# Altium PCB PCB1.PcbDoc
Units mm, origin at the board's own origin, x right, y up, seen from the top; angles counter-clockwise.
Board outline 152.4 x 101.6 mm, 2 copper layers (Top Layer, Bottom Layer); 35 components, 0 nets, 448 pads, 6 vias.
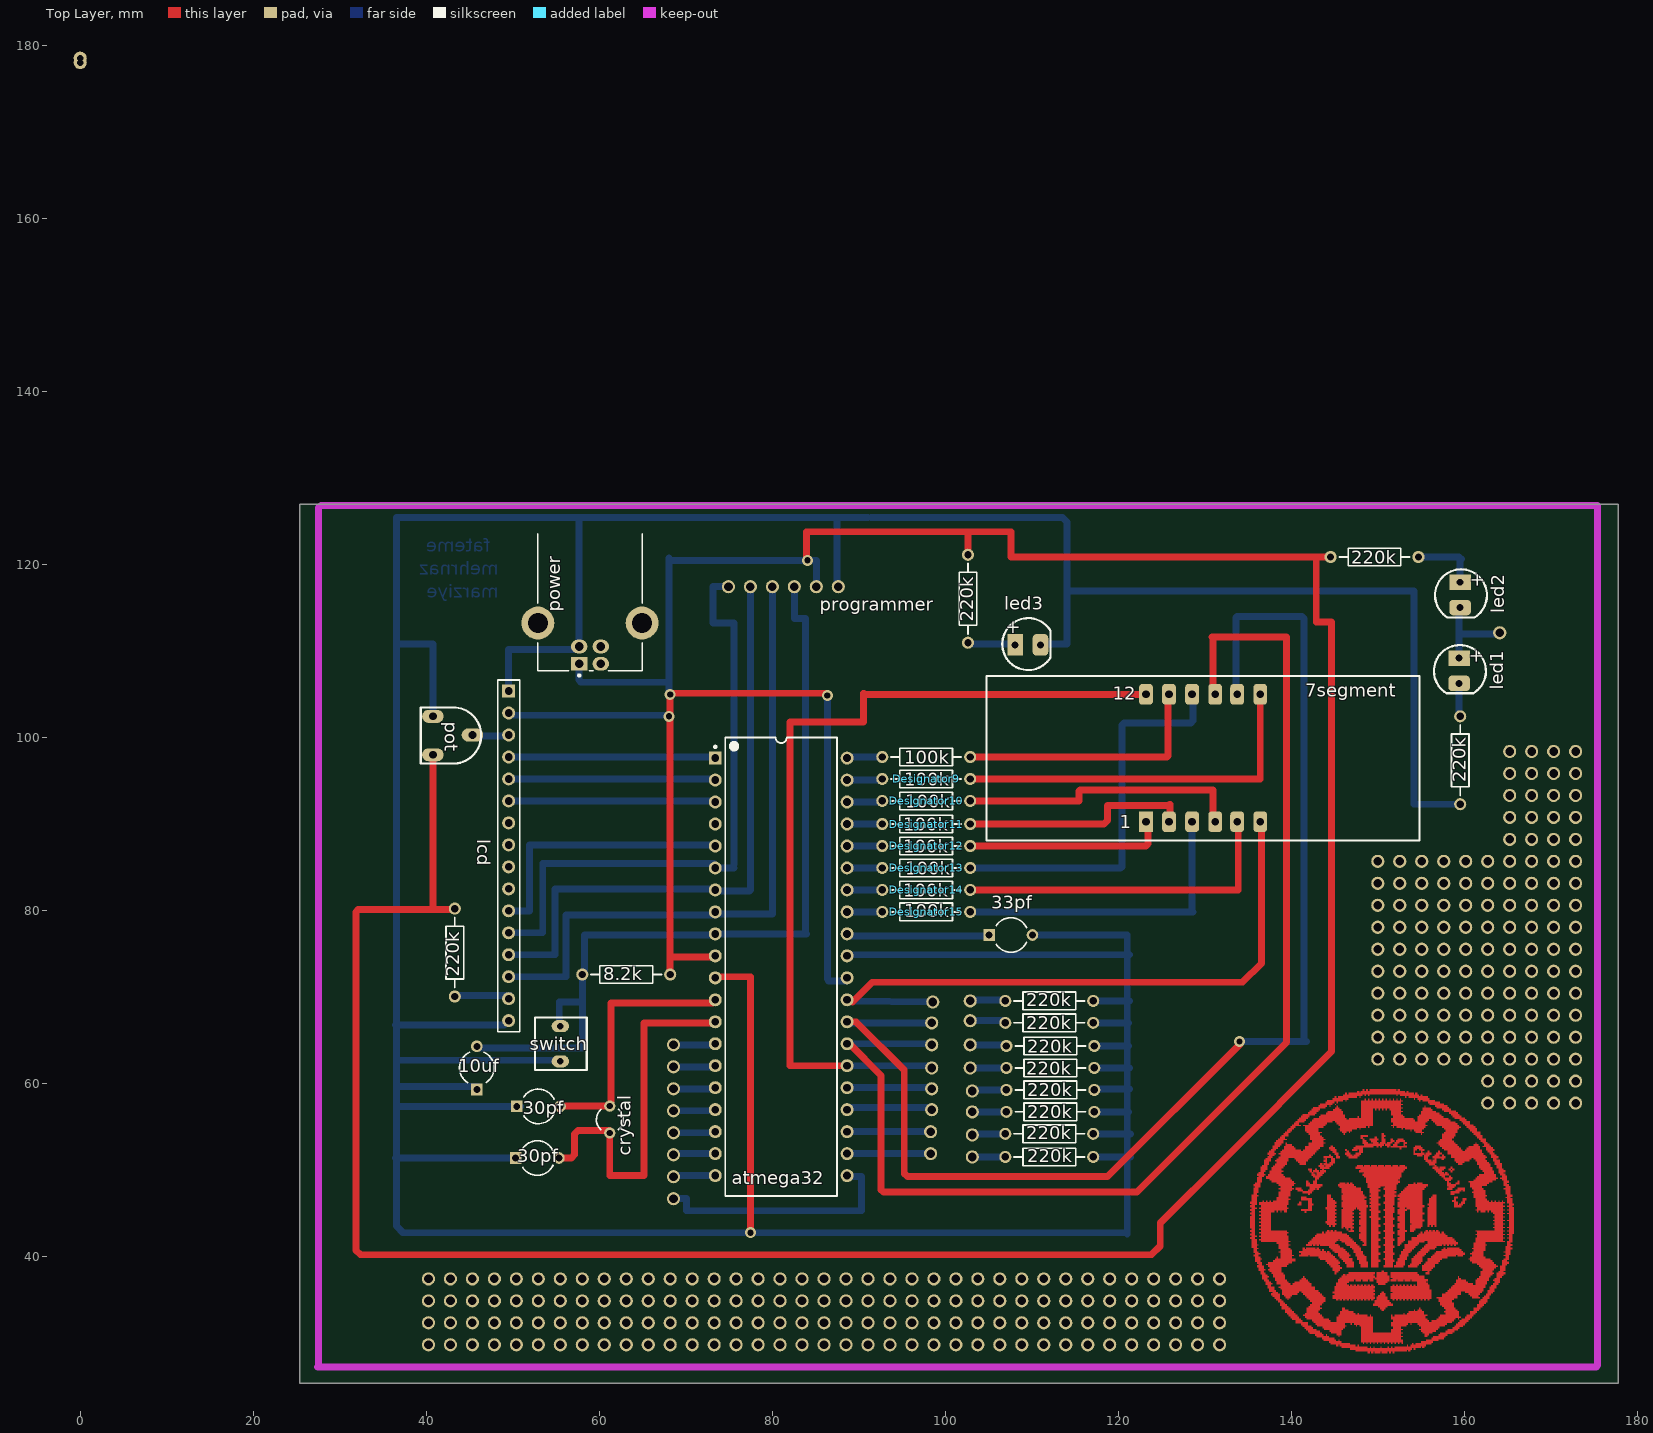
[diagram p0: Top Layer view]
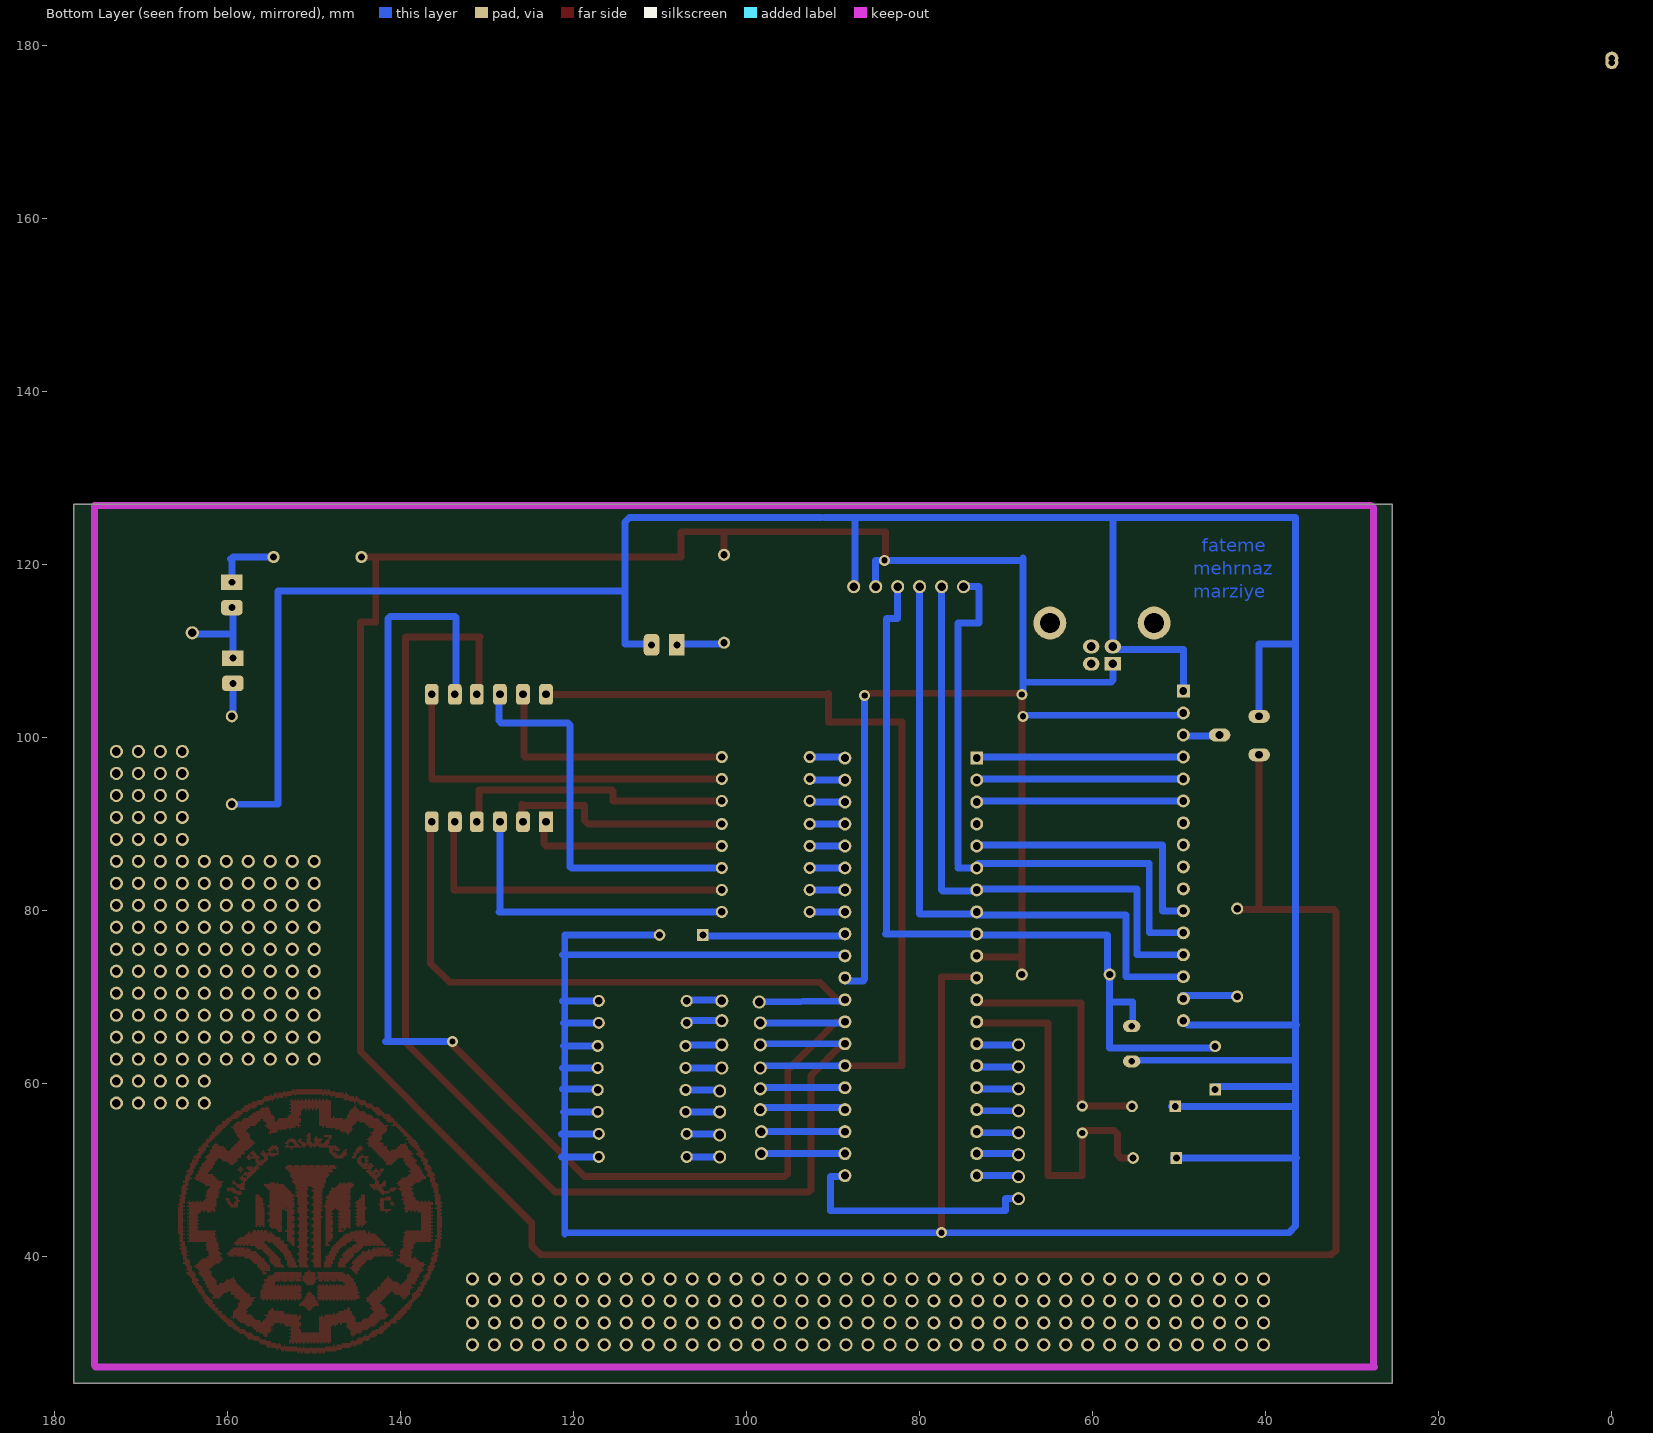
[diagram p1: Bottom Layer view, seen from below]

## Layer stack, top to bottom
Top Solder: solder mask 0.0102, Solder Resist, Dk 3.5
Top Layer: signal copper 0.0356
Dielectric 1: dielectric 0.32, FR-4, Dk 4.8
Bottom Layer: signal copper 0.0356
Bottom Solder: solder mask 0.0102, Solder Resist, Dk 3.5

## Board outline
25.4,25.4 177.8,25.4 177.8,127 25.4,127

## Design rules (kind name [scope] priority, off if disabled: settings)
Clearance [All] p1: gap=0.254
PolygonConnect [All] p1: connectstyle=Relief reliefconductorwidth=0.254 reliefentries=4 polygonreliefangle="90 Angle" airgapwidth=0.254
RoutingVias [All] p1: holewidth=0.711 width=1.27 viastyle="Through Hole" minholewidth=0.711 minwidth=1.27 maxholewidth=0.711 maxwidth=1.27
SolderMaskExpansion [All] p1: expansion=0.102
Width [All] p1: maxlimit=0.254 minlimit=0.254 preferedwidth=0.254
30 further rules are at their usual default settings.

## Components (designator, comment, footprint, x,y, rotation, side; value= is the part's Value field where it differs from the comment)
7segment "Comment" 7segCA 104.775,88.138 r0 top
8.2k "Comment" AXIAL-0.4 63.119,72.644 r0 top
10uf "Comment" CAPR5-4X5 45.847,61.849 r90 top
30pf "Comment" CAPR5-4X5 52.959,57.404 r0 top
30pf "Comment" CAPR5-4X5 52.832,51.435 r0 top
33pf "Comment" CAPR5-4X5 107.569,77.216 r0 top
100k "Comment" AXIAL-0.4 97.79,97.79 r0 top
220k "Comment" AXIAL-0.4 112.141,61.849 r0 top
220k "Comment" AXIAL-0.4 112.014,51.562 r0 top
220k "Comment" AXIAL-0.4 112.014,54.229 r0 top
220k "Comment" AXIAL-0.4 112.141,59.309 r0 top
220k "Comment" AXIAL-0.4 112.141,56.769 r0 top
220k "Comment" AXIAL-0.4 112.141,64.389 r0 top
220k "Comment" AXIAL-0.4 112.014,67.056 r0 top
220k "Comment" AXIAL-0.4 112.014,69.596 r0 top
220k "Comment" AXIAL-0.4 43.307,75.184 r90 top
220k "Comment" AXIAL-0.4 149.606,120.904 r0 top
220k "Comment" AXIAL-0.4 159.512,97.409 r90 top
220k "Comment" AXIAL-0.4 102.616,116.078 r90 top
atmega32 "Comment" 40P6 81.026,73.533 r0 top
crystal "Comment" R38 61.214,55.88 r180 top
Designator9 "100k" AXIAL-0.4 97.79,95.25 r0 top
Designator10 "100k" AXIAL-0.4 97.79,92.71 r0 top
Designator11 "100k" AXIAL-0.4 97.79,90.043 r0 top
Designator12 "100k" AXIAL-0.4 97.79,87.503 r0 top
Designator13 "100k" AXIAL-0.4 97.79,84.963 r0 top
Designator14 "100k" AXIAL-0.4 97.79,82.423 r0 top
Designator15 "100k" AXIAL-0.4 97.79,79.883 r0 top
lcd "Comment" HDR1X16 49.53,105.41 r270 top
led1 "Comment" LED-1 159.385,107.823 r0 top
led2 "Comment" LED-1 159.512,116.586 r0 top
led3 "Comment" LED-1 109.474,110.744 r90 top
pot "Comment" POT3 39.37,103.505 r270 top
power "Comment" USB2.5-2H4F 58.928,123.571 r90 top
switch "Comment" PB-2pin 58.547,61.595 r90 top

## Footprints (in the part's own frame and the unit in brackets; to place one, negate y for a bottom-side part, rotate by r counter-clockwise, add the part's x,y. Pads: shape width x height; smd on the part's side, far side on the other; paste and mask are expansions set on the pad)
7segCA [mm] "7seg-CA; 12 Leads"
  rect 1.6x2.4 hole 0.9: 1(18.415,2.159)
  rrect50% 1.6x2.4 hole 0.9: 2(21.082,2.159) 3(23.749,2.159) 4(26.416,2.159) 5(28.956,2.159) 6(31.623,2.159) 7(31.623,16.891) 8(28.956,16.891) 9(26.416,16.891) 10(23.749,16.891) 11(21.082,16.891) 12(18.415,16.891)
  silkscreen extent 0,0 50.04,19
40P6 [mm] "40-Pin Ceramic Dual In-Line Package (CerDIP)"
  rect 1.5x1.5 hole 0.9: 1(-7.62,24.13)
  round 1.5 hole 0.9: 2(-7.62,21.59) 3(-7.62,19.05) 4(-7.62,16.51) 5(-7.62,13.97) 6(-7.62,11.43) 7(-7.62,8.89) 8(-7.62,6.35) 9(-7.62,3.81) 10(-7.62,1.27) 11(-7.62,-1.27) 12(-7.62,-3.81) 13(-7.62,-6.35) 14(-7.62,-8.89) 15(-7.62,-11.43) 16(-7.62,-13.97) 17(-7.62,-16.51) 18(-7.62,-19.05) 19(-7.62,-21.59) 20(-7.62,-24.13) 21(7.62,-24.13) 22(7.62,-21.59) 23(7.62,-19.05) 24(7.62,-16.51) 25(7.62,-13.97) 26(7.62,-11.43) 27(7.62,-8.89) 28(7.62,-6.35) 29(7.62,-3.81) 30(7.62,-1.27) 31(7.62,1.27) 32(7.62,3.81) 33(7.62,6.35) 34(7.62,8.89) 35(7.62,11.43) 36(7.62,13.97) 37(7.62,16.51) 38(7.62,19.05) 39(7.62,21.59) 40(7.62,24.13)
  silkscreen extent -7.74,-26.5 6.45,26.5, body extent -7.05,-26.47 7.05,26.47, height 4.83
AXIAL-0.4 [mm] "Axial Device, Thru-Hole; 2 Leads; 0.4 in Pin Spacing"
  round 1.4 hole 0.85: 1(-5.08,0) 2(5.08,0)
  silkscreen extent -4.06,-1.02 4.06,1.02
CAPR5-4X5 [mm] "Capacitor; 2 Leads"
  rect 1.35x1.35 hole 0.8: 1(-2.5,0)
  round 1.35 hole 0.8: 2(2.5,0)
  silkscreen extent -1.69,-2 1.82,2
HDR1X16 [mm] "Connector; Header; 16 Position"
  rect 1.5x1.5 hole 0.9: 1(0,0)
  round 1.5 hole 0.9: 2(2.54,0) 3(5.08,0) 4(7.62,0) 5(10.16,0) 6(12.7,0) 7(15.24,0) 8(17.78,0) 9(20.32,0) 10(22.86,0) 11(25.4,0) 12(27.94,0) 13(30.48,0) 14(33.02,0) 15(35.56,0) 16(38.1,0)
  silkscreen extent -1.27,-1.27 39.37,1.27
LED-1 [mm] "LED; 2 Leads"
  rect 2.5x1.8 hole 0.8: 1(0,1.397)
  rrect50% 2.5x1.8 hole 0.8: 2(0,-1.524)
  silkscreen extent -2.91,-2.67 3.09,2.9
PB-2pin [mil] "Switch"
  oval 55.12x78.74 hole 30: 1(40,120) 2(200,120)
  silkscreen extent 0,0 240,235
POT3 [mm]
  oval 1.5x2.5 hole 0.9: 1(1.016,1.397) 2(5.461,1.397) 3(3.175,5.969)
  silkscreen extent 0,0 6.48,6.98
R38 [mm] "Crystal, Thru-Hole; 2 Leads; Body 3.1 x 8.2 mm (Dia.xH)"
  round 1.3 hole 0.7: 1(0,1.55) 2(0,-1.55)
  silkscreen extent -1.55,-1.19 1.55,1.17
USB2.5-2H4F [mm] "Connector; USB1.1, Type B, Thru-Hole; 4 Position; Right Angle"
  rect 1.6x1.9 hole 1: 1(-15.01,1.25)
  oval 1.6x1.9 hole 1: 2(-15.01,-1.25) 3(-13.01,-1.25) 4(-13.01,1.25)
  round 3.8 hole 2.3: 5(-10.3,6.02) 6(-10.3,-6.02)
  silkscreen extent -16.48,-6.05 -0.02,6.05, body extent -16.51,-7.45 -0.01,7.45, height 10.95

## Free pads (board coordinates)
  round 1.524 hole 0.762: 1(0,178.054) 2(0,178.562)
  round 1.524 hole 1: 13(98.552,69.469) 14(98.425,67.056) 15(98.425,64.516) 16(98.425,61.849) 17(98.425,59.436) 18(98.425,57.023) 19(98.298,54.483) 20(98.298,51.943) 21(102.87,69.596) 22(102.87,67.31) 23(102.87,64.516) 24(102.87,61.849) 25(103.124,59.182) 26(103.124,56.769) 27(103.124,54.102) 28(103.124,51.562) 32(68.58,64.516) 33(68.58,61.976) 34(68.58,59.436) 35(68.58,56.896) 36(68.58,54.356) 37(68.58,51.816) 38(68.58,49.276) 39(68.58,46.736) 49(77.47,117.475) 50(80.01,117.475) 52(85.09,117.475) 53(87.63,117.475) 76(164.084,112.141) 77(172.847,98.425) 78(172.847,95.885) 79(172.847,93.345) 80(172.847,90.805) 82(172.847,88.265) 83(172.847,85.725) 84(172.847,83.185) 85(172.847,80.645) 86(172.847,78.105) 87(172.847,75.565) 88(172.847,73.025) 89(172.847,70.485) 90(172.847,67.945) 91(172.847,65.405) 92(172.847,62.865) 93(172.847,60.325) 94(172.847,57.785) 96(170.307,98.425) 97(170.307,95.885) 98(170.307,93.345) 99(170.307,90.805) 100(170.307,88.265) 101(170.307,85.725) 102(170.307,83.185) 105(170.307,80.645) 106(170.307,78.105) 107(170.307,75.565) 108(170.307,73.025) 109(170.307,70.485) 110(170.307,67.945) 111(170.307,65.405) 112(170.307,62.865) 113(170.307,60.325) 114(170.307,57.785) 115(167.767,57.785) 116(167.767,60.325) 117(167.767,62.865) 118(167.767,65.405) 119(167.767,67.945) 120(167.767,70.485) 121(167.767,73.025) 122(167.767,75.565) 123(167.767,78.105) 124(167.767,80.645) 125(167.767,83.185) 126(167.767,85.725) 127(167.767,88.265) 128(167.767,90.805) 129(167.767,93.345) 130(167.767,95.885) 131(167.767,98.425) 132(165.227,98.425) 133(165.227,95.885) 134(165.227,93.345) 135(165.227,90.805) 136(165.227,88.265) 137(165.227,85.725) 138(165.227,83.185) 139(165.227,80.645) 140(165.227,78.105) 141(165.227,75.565) 142(165.227,73.025) 143(165.227,70.485) 144(165.227,67.945) 145(165.227,65.405) 146(165.227,62.865) 147(165.227,60.325) 148(165.227,57.785) 149(162.687,57.785) 150(162.687,60.325) 151(162.687,62.865) 152(162.687,65.405) 153(162.687,67.945) 154(162.687,70.485) 155(162.687,73.025) 156(162.687,75.565) 157(162.687,78.105) 158(162.687,80.645) 159(162.687,83.185) 160(162.687,85.725) 163(160.147,62.865) 164(160.147,65.405) 165(160.147,67.945) 166(160.147,70.485) 167(160.147,73.025) 168(160.147,75.565) 169(160.147,78.105) 170(160.147,80.645) 171(160.147,83.185) 172(160.147,85.725) 174(157.607,85.725) 175(157.607,83.185) 176(157.607,80.645) 177(157.607,78.105) 178(157.607,75.565) 179(157.607,73.025) 180(157.607,70.485) 181(157.607,67.945) 182(157.607,65.405) 183(157.607,62.865) 185(155.067,85.725) 186(155.067,83.185) 187(155.067,80.645) 188(155.067,78.105) 189(155.067,75.565) 190(155.067,73.025) 191(155.067,70.485) 192(155.067,67.945) 193(155.067,65.405) 194(155.067,62.865) 195(152.527,62.865) 196(152.527,65.405) 197(152.527,67.945) 198(152.527,70.485) 199(152.527,73.025) 200(152.527,75.565) 201(152.527,78.105) 202(152.527,80.645) 203(152.527,83.185) 204(152.527,85.725) 205(149.987,85.725) 206(149.987,83.185) 207(149.987,80.645) 208(149.987,78.105) 209(149.987,75.565) 210(149.987,73.025) 211(149.987,70.485) 212(149.987,67.945) 213(149.987,65.405) 214(149.987,62.865) 221(82.55,117.475) 229(74.93,117.475) 230(40.259,29.845) 231(42.799,29.845) 232(45.339,29.845) 233(47.879,29.845) 234(50.419,29.845) 235(52.959,29.845) 236(55.499,29.845) 237(58.039,29.845) 238(60.579,29.845) 239(63.119,29.845) 240(65.659,29.845) 241(68.199,29.845) 242(70.739,29.845) 243(73.279,29.845) 244(75.819,29.845) 245(78.359,29.845) 246(80.899,29.845) 247(83.439,29.845) 248(85.979,29.845) 249(88.519,29.845) 250(88.519,32.385) 251(85.979,32.385) 252(83.439,32.385) 253(80.899,32.385) 254(78.359,32.385) 257(73.279,32.385) 258(75.819,32.385) 259(70.739,32.385) 260(68.199,32.385) 261(65.659,32.385) 262(63.119,32.385) 263(60.579,32.385) 264(58.039,32.385) 265(55.499,32.385) 266(52.959,32.385) 267(50.419,32.385) 268(47.879,32.385) 269(45.339,32.385) 270(42.799,32.385) 271(40.259,32.385) 272(40.259,34.925) 273(42.799,34.925) 274(45.339,34.925) 275(47.879,34.925) 276(50.419,34.925) 277(52.959,34.925) 278(55.499,34.925) 279(58.039,34.925) 280(60.579,34.925) 281(63.119,34.925) 282(65.659,34.925) 283(68.199,34.925) 284(70.739,34.925) 285(73.279,34.925) 286(75.819,34.925) 287(78.359,34.925) 288(80.899,34.925) 289(83.439,34.925) 290(85.979,34.925) 291(88.519,34.925) 292(88.519,37.465) 293(85.979,37.465) 294(83.439,37.465) 295(80.899,37.465) 296(78.359,37.465) 297(75.819,37.465) 298(73.279,37.465) 299(70.739,37.465) 300(68.199,37.465) 301(65.659,37.465) 302(63.119,37.465) 303(60.579,37.465) 304(58.039,37.465) 305(55.499,37.465) 306(52.959,37.465) 307(50.419,37.465) 308(47.879,37.465) 309(45.339,37.465) 310(42.799,37.465) 311(40.259,37.465) 313(91.059,29.845) 314(93.599,29.845) 315(96.139,29.845) 316(98.679,29.845) 317(101.219,29.845) 318(103.759,29.845) 319(106.299,29.845) 320(108.839,29.845) 321(111.379,29.845) 322(113.919,29.845) 323(116.459,29.845) 324(118.999,29.845) 325(121.539,29.845) 326(124.079,29.845) 327(126.619,29.845) 328(129.159,29.845) 329(131.699,29.845) 332(131.699,32.385) 333(129.159,32.385) 334(126.619,32.385) 335(124.079,32.385) 336(121.539,32.385) 337(118.999,32.385) 338(116.459,32.385) 339(113.919,32.385) 340(111.379,32.385) 341(108.839,32.385) 342(106.299,32.385) 343(103.759,32.385) 344(101.219,32.385) 345(98.679,32.385) 346(96.139,32.385) 347(93.599,32.385) 348(91.059,32.385) 349(91.059,34.925) 350(93.599,34.925) 351(96.139,34.925) 352(98.679,34.925) 353(101.219,34.925) 354(103.759,34.925) 355(106.299,34.925) 356(108.839,34.925) 357(111.379,34.925) 358(113.919,34.925) 359(116.459,34.925) 360(118.999,34.925) 361(121.539,34.925) 362(124.079,34.925) 363(126.619,34.925) 364(129.159,34.925) 365(131.699,34.925) 366(131.699,37.465) 367(129.159,37.465) 368(126.619,37.465) 369(124.079,37.465) 370(121.539,37.465) 371(118.999,37.465) 372(116.459,37.465) 373(113.919,37.465) 374(111.379,37.465) 375(108.839,37.465) 376(106.299,37.465) 377(103.759,37.465) 378(101.219,37.465) 379(98.679,37.465) 380(96.139,37.465) 381(93.599,37.465) 382(91.059,37.465)

## Via types
v1: diameter 1.27, hole 0.711, Top Layer to Bottom Layer, 6 vias

## Nets (pads, with @x,y where several pads share a name; then routed paths per layer and width w, separated by ;. In a path a pad name is that pad's centre, name@x,y a point inside that pad or via, vN(x,y) a via of type N, cw(c..) or ccw(c..) an arc to the next point about the centre after c; other vN are vias at no path point)
pads on no net: 7segment.1 7segment.2 7segment.3 7segment.4 7segment.5 7segment.6 7segment.7 7segment.8 7segment.9 7segment.10 7segment.11 7segment.12 8.2k.1 8.2k.2 10uf.1 10uf.2 30pf.1 30pf.2 33pf.1 33pf.2 100k.1 100k.2 220k.1 220k.2 atmega32.1 atmega32.2 atmega32.3 atmega32.4 atmega32.5 atmega32.6 atmega32.7 atmega32.8 atmega32.9 atmega32.10 atmega32.11 atmega32.12 atmega32.13 atmega32.14 atmega32.15 atmega32.16 atmega32.17 atmega32.18 atmega32.19 atmega32.20 atmega32.21 atmega32.22 atmega32.23 atmega32.24 atmega32.25 atmega32.26 atmega32.27 atmega32.28 atmega32.29 atmega32.30 atmega32.31 atmega32.32 atmega32.33 atmega32.34 atmega32.35 atmega32.36 atmega32.37 atmega32.38 atmega32.39 atmega32.40 crystal.1 crystal.2 Designator9.1 Designator9.2 Designator10.1 Designator10.2 Designator11.1 Designator11.2 Designator12.1 Designator12.2 Designator13.1 Designator13.2 Designator14.1 Designator14.2 Designator15.1 Designator15.2 lcd.1 lcd.2 lcd.3 lcd.4 lcd.5 lcd.6 lcd.7 lcd.8 lcd.9 lcd.10 lcd.11 lcd.12 lcd.13 lcd.14 lcd.15 lcd.16 led1.1 led1.2 led2.1 led2.2 led3.1 led3.2 pot.1 pot.2 pot.3 power.1 power.2 power.3 power.4 power.5 power.6 switch.1 switch.2
copper on no net: | length 2524.5
  Top Layer w0.8: 40.767,80.391 40.767,97.79 ; 43.053,80.137 32.131,80.137 31.877,79.883 31.877,40.767 32.385,40.259 123.825,40.259 124.841,41.275 124.841,43.942 132.588,51.689 144.653,63.754 144.653,108.204 144.653,113.411 142.875,113.411 142.875,120.904 ; 55.118,51.435 56.769,51.435 57.15,51.816 57.15,54.229 57.531,54.61 61.214,54.61 61.214,49.403 65.151,49.403 65.151,67.056 73.533,67.056 ; 55.219,57.43 61.214,57.43 ; 61.341,57.912 61.341,69.342 73.152,69.342 ; 68.199,72.644 v1(68.199,105.029) ; v1@68.326,105.156 v1@86.233,105.156 ; 68.453,74.676 73.533,74.676 ; 73.279,72.39 77.47,72.39 v1(77.47,42.799) ; v1@83.947,120.65 83.947,123.825 94.869,123.825 107.569,123.825 107.569,120.904 144.526,120.904 ; 88.646,62.103 82.042,62.103 82.042,69.342 82.042,101.854 90.551,101.854 90.551,105.156 90.678,105.029 123.19,105.029 ; 88.646,64.643 88.9,64.643 92.583,60.96 92.583,47.752 92.837,47.498 122.174,47.498 139.446,64.77 139.446,78.74 139.446,111.633 130.81,111.633 130.937,111.506 130.937,105.537 ; 88.646,69.723 88.773,69.723 ; 88.9,67.183 89.662,67.183 95.25,61.595 95.25,49.657 95.631,49.276 118.745,49.276 v1@134.112,64.643 ; 89.281,69.469 91.567,71.755 134.366,71.755 136.525,73.914 136.525,89.535 ; 102.616,121.158 102.616,123.825 ; 102.87,82.423 133.858,82.423 133.858,90.297 ; 102.87,87.503 123.19,87.503 123.444,87.757 123.444,90.043 123.19,90.297 ; 102.87,90.043 118.364,90.043 118.745,90.424 118.745,92.202 125.857,92.202 125.984,92.329 125.984,90.424 125.857,90.297 ; 102.87,92.71 115.443,92.71 115.443,93.853 ; 102.87,95.25 136.398,95.25 136.398,105.029 ; 102.87,97.79 125.603,97.79 125.73,97.917 125.73,104.902 ; 115.57,93.98 130.937,93.98 130.937,90.678 131.064,90.551
  Bottom Layer w0.8: 36.449,51.435 50.673,51.435 ; 36.449,66.802 49.022,66.802 49.53,67.31 ; 36.576,59.69 45.974,59.69 ; 36.576,110.871 40.767,110.871 40.767,102.489 ; 36.703,57.404 50.927,57.404 ; 36.83,62.738 55.88,62.738 ; 43.434,70.231 49.657,70.231 ; 45.593,100.203 49.403,100.203 ; 46.061,64.135 58.039,64.135 58.039,69.723 ; 49.403,102.616 v1@68.199,102.616 ; 49.53,72.39 56.134,72.39 56.134,79.502 73.406,79.502 ; 49.53,74.93 54.864,74.93 54.864,82.55 73.533,82.55 ; 49.53,77.47 53.467,77.47 53.467,85.471 73.279,85.471 ; 49.53,80.01 51.943,80.01 51.943,87.63 73.533,87.63 ; 49.53,92.71 73.279,92.71 ; 49.53,95.25 73.533,95.25 ; 49.53,97.79 73.533,97.79 ; 49.53,105.283 49.53,105.41 49.53,110.236 57.277,110.236 ; 55.372,66.802 55.372,69.469 57.785,69.469 58.039,69.723 ; 57.658,108.541 57.658,106.68 57.912,106.426 68.072,106.426 ; 57.678,110.561 57.678,125.242 ; 58.166,72.517 58.039,72.39 58.039,69.723 ; 58.293,72.898 58.293,77.216 73.533,77.216 ; 68.072,120.523 85.09,120.523 85.09,117.475 85.072,117.728 ; 68.072,120.777 68.072,105.029 68.199,104.902 v1@68.326,104.902 ; 68.58,49.403 73.787,49.403 ; 68.58,51.943 73.66,51.943 ; 68.58,54.356 73.533,54.356 ; 68.58,56.896 73.533,56.896 ; 68.58,59.436 73.533,59.436 ; 68.58,61.976 73.533,61.976 ; 68.58,64.516 73.533,64.516 ; 68.961,46.736 70.104,46.736 70.104,45.339 90.297,45.339 90.297,49.276 88.773,49.276 ; 73.279,79.756 73.406,79.883 ; 73.406,84.963 75.565,84.963 ; 73.533,82.296 77.343,82.296 77.47,82.423 77.47,117.475 ; 73.533,87.376 73.533,87.503 ; 73.66,77.343 83.947,77.343 ; 73.66,79.629 80.01,79.629 80.01,117.475 ; 74.93,117.475 73.152,117.475 73.152,113.284 75.565,113.284 75.565,85.344 ; 82.55,117.475 82.55,113.792 83.82,113.792 83.82,77.47 83.82,77.597 ; 86.36,72.136 v1@86.36,105.156 ; 86.487,71.882 88.646,71.882 ; 87.503,117.348 87.503,125.476 ; 88.392,97.79 92.71,97.79 ; 88.646,54.483 98.298,54.483 ; 88.646,57.277 98.298,57.277 ; 88.646,59.563 98.552,59.563 ; 88.646,62.103 98.171,62.103 ; 88.646,64.643 98.298,64.643 ; 88.646,79.883 92.71,79.883 ; 88.646,82.423 92.71,82.423 ; 88.646,84.963 92.71,84.963 ; 88.646,87.503 92.71,87.503 ; 88.646,90.043 92.71,90.043 ; 88.646,92.583 92.583,92.583 ; 88.646,95.123 92.583,95.123 ; 88.773,67.056 98.425,67.056 ; 88.773,69.596 98.552,69.469 ; 88.9,51.943 98.298,51.943 ; 89.027,74.93 121.285,74.93 ; 89.027,77.089 105.323,77.089 ; 91.059,125.476 36.576,125.476 36.576,43.561 37.338,42.799 120.904,42.799 121.031,42.672 121.031,77.089 121.031,77.216 110.069,77.216 ; 91.44,125.476 113.538,125.476 114.046,124.968 114.046,110.871 111.887,110.871 ; 102.87,61.849 107.188,61.849 107.315,61.722 ; 102.87,64.516 106.934,64.516 ; 102.87,67.31 106.68,67.31 ; 102.87,79.883 128.651,79.883 ; 102.87,84.963 120.269,84.963 120.396,85.09 120.396,101.473 120.65,101.727 128.397,101.727 128.651,101.981 128.651,104.902 ; 102.87,110.871 107.95,110.871 ; 102.997,54.229 106.934,54.229 ; 102.997,69.723 107.188,69.723 ; 103.124,51.562 106.934,51.562 ; 103.124,56.769 107.061,56.769 ; 103.251,59.309 107.061,59.309 ; 114.173,116.967 154.178,116.967 154.178,92.329 159.512,92.329 ; 116.967,59.436 121.285,59.436 ; 116.967,64.389 121.158,64.389 ; 117.094,54.229 121.412,54.229 ; 117.094,67.056 121.158,67.056 ; 117.094,69.596 121.285,69.596 ; 117.221,56.769 121.158,56.769 ; 117.221,61.849 121.285,61.849 ; 117.348,51.562 121.412,51.562 ; 128.524,80.01 128.524,90.297 ; 133.604,105.791 133.604,113.919 133.731,114.046 141.224,114.046 141.478,113.792 141.478,65.151 ; v1(133.985,64.897) 141.732,64.897 ; 154.686,120.904 159.385,120.904 ; 159.385,102.87 159.385,106.426 ; 159.385,109.22 159.385,114.935 ; 159.385,112.014 163.957,112.014 ; 159.512,118.237 159.512,120.523 159.639,120.65
  other v1: 68.072,102.489 86.36,104.902 84.074,120.523

## Keep-outs
Keep-Out Layer:
  lines w0.8: 27.432,27.305 175.26,27.305 175.387,27.432 175.387,126.873 27.813,126.873 27.559,126.619 27.559,27.432 27.432,27.305

## Other copper
Top Layer:
  drawing of 24 lines, arcs and shapes, not listed
Bottom Layer:
  text "fateme" at 47.371,121.539 h1.52
  text "mehrnaz" at 48.387,118.872 h1.52
  text "marziye" at 48.387,116.205 h1.52

## Silkscreen, mask and mechanical layers (free items; w line width, h text height)
Top Overlay:
  text "programmer" at 85.471,114.681 h1.52

## Text inside footprints (layer, text, board x,y; h text height)
7segment: Top Overlay "1" at 120.142,89.535 h1.52; Top Overlay "12" at 119.38,104.394 h1.52
led1: Top Overlay "+" at 162.052,108.585 h1.52 r90
led2: Top Overlay "+" at 162.179,117.348 h1.52 r90
led3: Top Overlay "+" at 108.712,113.411 h1.52 r180
power: Mechanical 1 "PCB Edge" at 64.579,123.246 h0.25 r180